# Altium PCB BLDC controlle_V3.PcbDoc
Units mm, origin at the board's own origin, x right, y up, seen from the top; angles counter-clockwise.
Board outline 91.2 x 46.99 mm, 2 copper layers (Top Layer, Bottom Layer); 97 components, 98 nets, 316 pads, 249 vias.
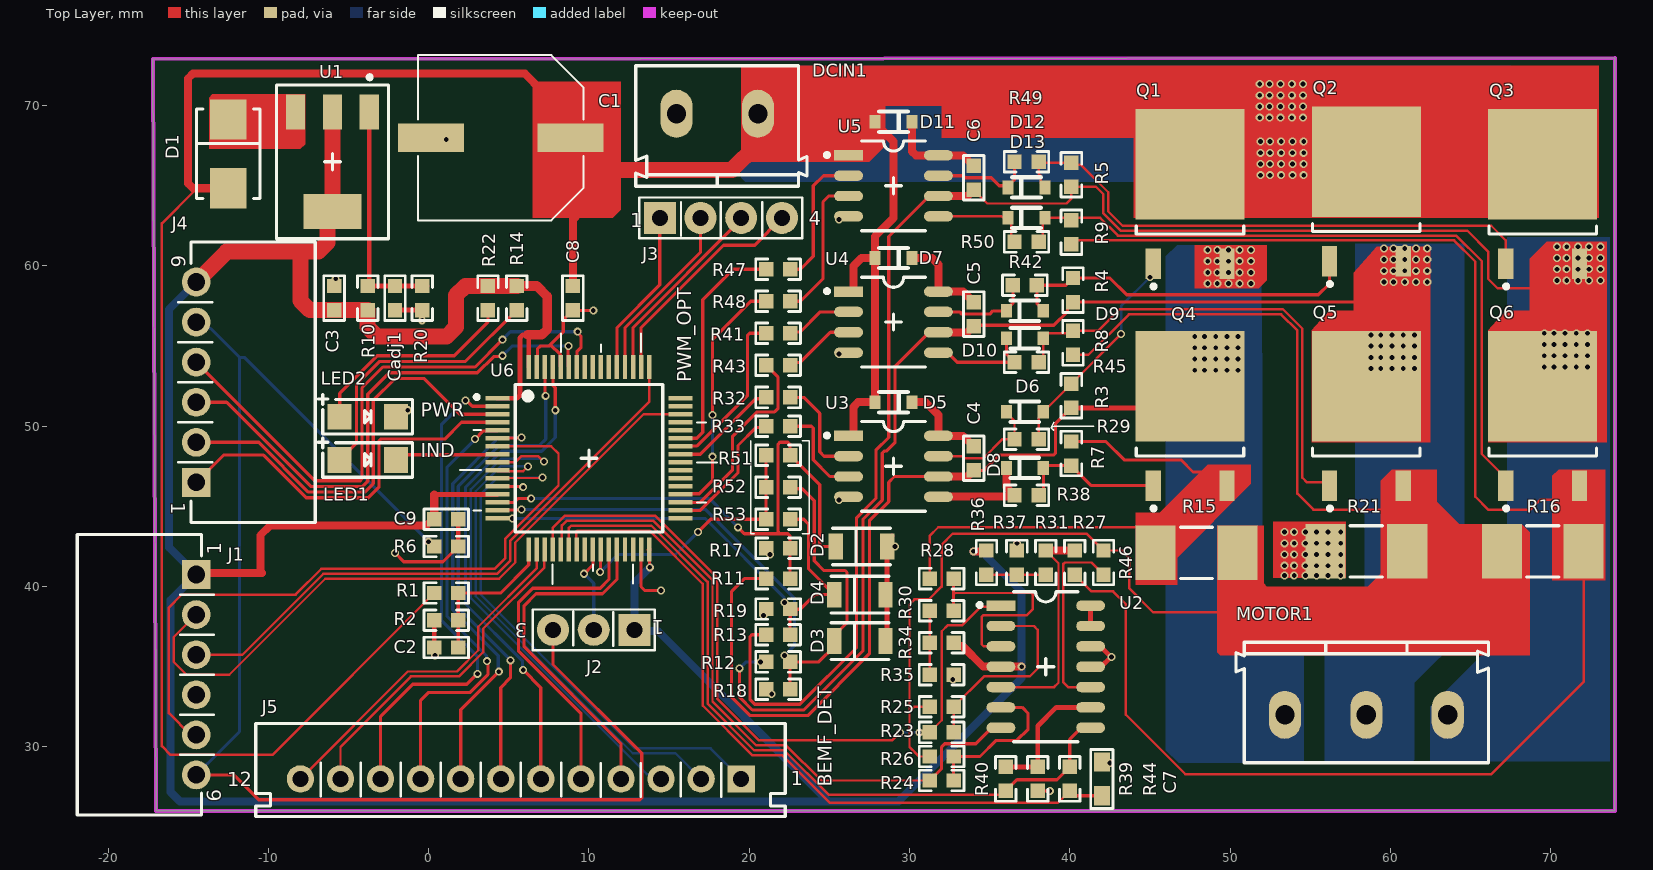
[diagram p0: Top Layer view]
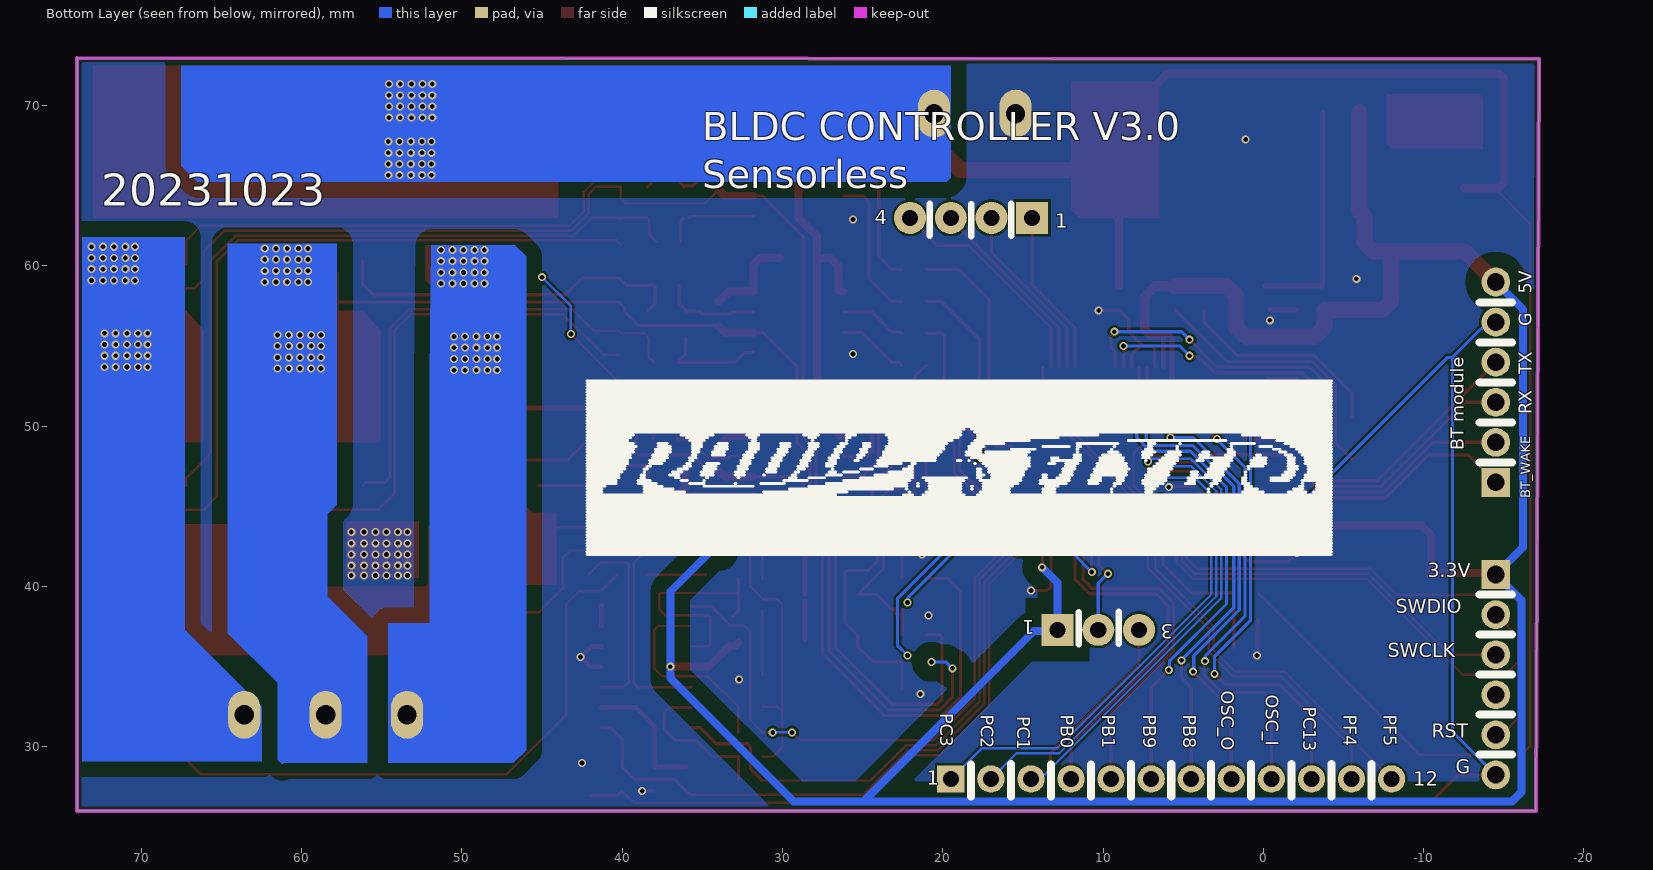
[diagram p1: Bottom Layer view, seen from below]
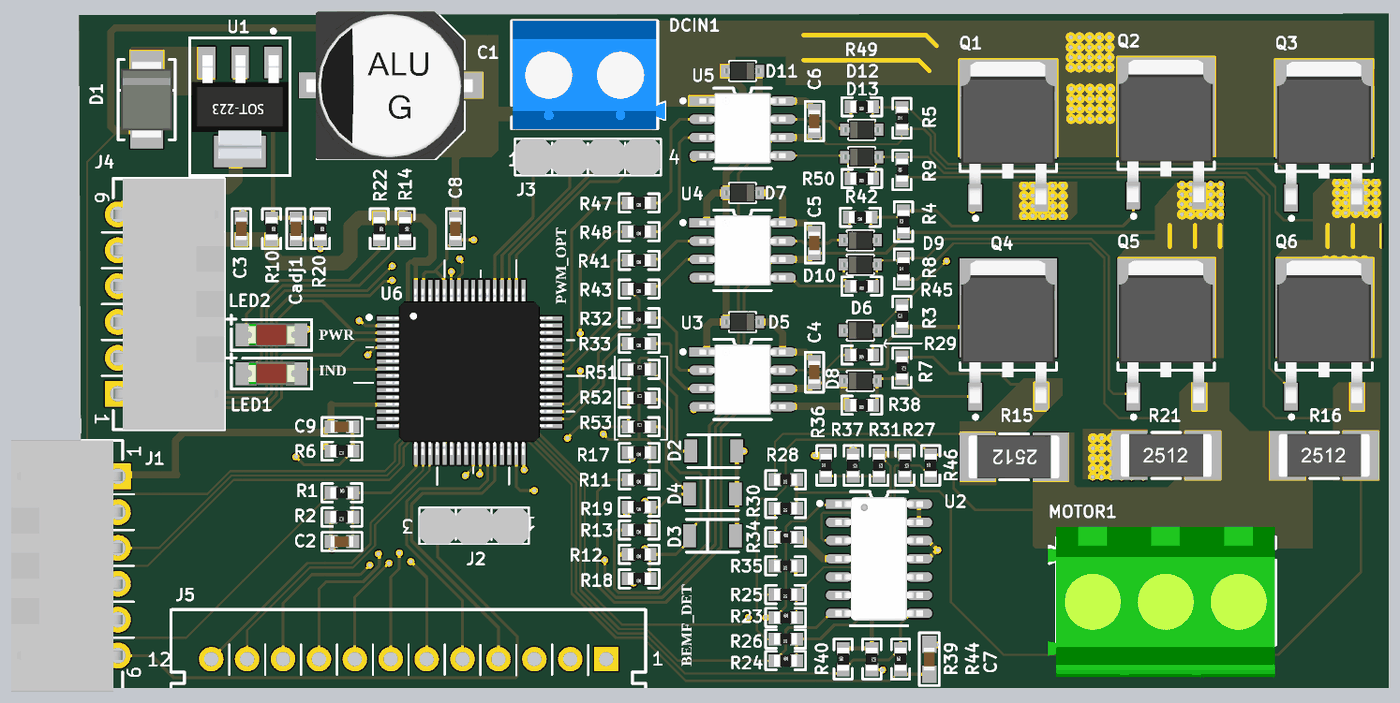
[diagram p2: 3D render of the assembled board from above, using the file's embedded part models]

## Layer stack, top to bottom
Top Solder: solder mask 0.0102, Solder Resist, Dk 3.5
Top Layer: signal copper 0.0356
Dielectric 1: dielectric 0.32, FR-4, Dk 4.8
Bottom Layer: signal copper 0.0356
Bottom Solder: solder mask 0.0102, Solder Resist, Dk 3.5

## Board outline
-17,26 -17.2,72.9 74,72.988 74,26

## Design rules (kind name [scope] priority, off if disabled: settings)
Clearance "Polygon clearence bat" [InPolygon vs InNet('V_Bat')] p1: gap=1 ignorepadtopadclearanceinfootprint=FALSE
Clearance "Polygon clearence power path" [InPolygon vs InNet('PA') Or InNet('PB') Or InNet('PC') Or  InNet('IC') Or InNet('IB') Or InNet('IA') Or  InNet('3.3V')] p2: gap=1 ignorepadtopadclearanceinfootprint=FALSE
Clearance [All] p3: gap=0.152 ignorepadtopadclearanceinfootprint=FALSE
DiffPairsRouting [All] p1: maxlimit=0.254 minlimit=0.254 mostfreqgap=0.254 toplayer_minwidth=0.381 toplayer_maxwidth=0.381 toplayer_prefwidth=0.381 bottomlayer_minwidth=0.381 bottomlayer_maxwidth=0.381 bottomlayer_prefwidth=0.381 substack1={16BC12FD-55DF-4440-831C-986EA8E48B1B} toplayer_{16bc12fd-55df-4440-831c-986ea8e48b1b}_minwidth=0.381 toplayer_{16bc12fd-55df-4440-831c-986ea8e48b1b}_maxwidth=0.381 toplayer_{16bc12fd-55df-4440-831c-986ea8e48b1b}_prefwidth=0.381 bottomlayer_{16bc12fd-55df-4440-831c-986ea8e48b1b}_minwidth=0.381 bottomlayer_{16bc12fd-55df-4440-831c-986ea8e48b1b}_maxwidth=0.381 bottomlayer_{16bc12fd-55df-4440-831c-986ea8e48b1b}_prefwidth=0.381 maxuncoupledlength=12.7
PlaneConnect [All] p1: planeconnectstyle=Direct reliefexpansion=0.508 reliefentries=4 reliefconductorwidth=0.254 reliefairgap=0.254
PolygonConnect [All] p1: connectstyle=Direct reliefconductorwidth=0.254 reliefentries=4 polygonreliefangle="90 Angle" airgapwidth=0.254
RoutingVias [All] p1: holewidth=0.711 width=1.27 viastyle="Through Hole" minholewidth=0.711 minwidth=1.27 maxholewidth=0.711 maxwidth=1.27
SolderMaskExpansion [All] p1: expansion=0.102 istentingtop=FALSE
Width [All] p1: maxlimit=10 minlimit=0.152 preferedwidth=0.254 substack1={16BC12FD-55DF-4440-831C-986EA8E48B1B} toplayer_{16bc12fd-55df-4440-831c-986ea8e48b1b}_minwidth=0.1 bottomlayer_{16bc12fd-55df-4440-831c-986ea8e48b1b}_minwidth=0.1
28 further rules are at their usual default settings.

## Classes and differential pairs
component class MCU: C9 J5 U6
component class E-scooter: 3 C1 C2 C3 C4 C5 C6 C7 C8 Cadj1 D1 D2 D3 D4 D5 D6 D7 D8 D9 D10 D11 D12 D13 DCIN1 LED1 LED2 Q1 Q2 Q3 Q4 Q5 Q6 R1 R2 R3 R4 R5 R6 R7 R8 R9 R10 R11 R12 R13 R14 R15 R16 R17 R18 R19 R20 R21 R22 R23 R24 R25 R26 R27 R28 R29 R30 R31 R32 R33 R34 R35 R36 R37 R38 R39 R40 R41 R42 R43 R44 R45 R46 R47 R48 R49 R50 R51 R53 U1 U2 U3 U4 U5
component class Connector: J1 J2 J3 J4 MOTOR1

## Components (designator, comment, footprint, x,y, rotation, side; value= is the part's Value field where it differs from the comment)
C1 "PBE099550-4710" "CASE - G" 4.5,68 r0 top
C2 "PXL456470-1530" CAPC0603-RW 1.1,36.2 r180 top value=10uf
C3 "PXL456470-1530" CAPC0603-RW -5.9,58 r90 top value=10uf
C4 "PXL456470-1530" CAPC0603-RW 34,48 r90 top value=10uf
C5 "PXL456470-1530" CAPC0603-RW 34,57 r90 top value=10uf
C6 "PXL456470-1530" CAPC0603-RW 34,65.5 r90 top value=10uf
C7 "PXL456470-1530" CAPC0603-SW 42,28 r270 top value=1UF
C8 "PXL456470-1530" CAPC0603-RW 9,58 r90 top value=0.1UF
C9 "PXL456470-1530" CAPC0603-RW 1.1,44.2 r180 top value=0.1uf
Cadj1 "PXL456470-1530" CAPC0603-RW -2.1,58 r270 top value=10uf
D1 "DIO STPS2200U" SMB -12.5,67 r90 top
D2 "RCZ005015-0020" LL34 27,42.5 r180 top
D3 "RCZ005015-0020" LL34 26.9,36.6 r180 top
D4 "RCZ005015-0020" LL34 26.9,39.5 r180 top
D5 "RCD114148-0020" SOD-323 29,51.5 r0 top
D6 "RCD114148-0020" SOD-323 37.2,50.9 r180 top
D7 "RCD114148-0020" SOD-323 29,60.5 r0 top
D8 "RCD114148-0020" SOD-323 37.2,47.4 r180 top
D9 "RCD114148-0020" SOD-323 37.2,57.2 r180 top
D10 "RCD114148-0020" SOD-323 37.2,55.5 r180 top
D11 "RCD114148-0020" SOD-323 29,69 r0 top
D12 "RCD114148-0020" SOD-323 37.3,64.9 r180 top
D13 "RCD114148-0020" SOD-323 37.3,63 r180 top
DCIN1 "KF/WJ/DG 30x connecter" "KF/WJ/DG 301-2p-5.0mm" 18,69.5 r180 top
J1 "T690300121600" "CONN 6P PH=2.5mm RA XHB-6AW-KL" -14.5,34.5 r90 top value=2.5mm
J2 "CCP254010-0103" "HEAD 3P PH=2.54mm 180" 10.3,37.3 r180 top value=2.54mm
J3 "CCP254260-0104" "HEAD 4P PH=2.54mm 180" 18.23,63 r0 top value=2.54mm
J4 "T690300121600" "CONN 6P PH=2.5mm RA XHB-6AW-KL" -14.5,52.75 r270 top value=2.5mm
J5 "T690300029300" "CONN 12P PH=2.5 ST HAA250A-12A" 5.75,28 r0 top value=2.5mm
LED1 "LED1206R_23-21\R6C-AM1N2AY\2A" LED1206-RED -3.8,47.9 r0 top
LED2 "LED1206R_23-21\R6C-AM1N2AY\2A" LED1206-RED -3.8,50.6 r0 top
MOTOR1 "KF/WJ/DG 30x connecter" "KF/WJ/DG 301-3p-5.0mm" 58.5,32 r0 top
Q1 "T5860038503A6" TO252-3 47.5,64.5 r90 top locked
Q2 "T5860038503A6" TO252-3 58.5,64.65 r90 top locked
Q3 "T5860038503A6" TO252-3 69.5,64.5 r90 top locked
Q4 "T5860038503A6" TO252-3 47.5,50.65 r90 top locked
Q5 "T5860038503A6" TO252-3 58.5,50.65 r90 top locked
Q6 "T5860038503A6" TO252-3 69.5,50.65 r90 top locked
R1 "T5024421083A9" 0603-RW 1.1,39.6 r0 top value=43k
R2 "T5024421083A9" 0603-RW 1.1,37.9 r180 top value=6.2k
R3 "T5024421083A9" 0603-RW 40.1,51.9 r90 top value=10k
R4 "T5024421083A9" 0603-RW 40.2,58.5 r90 top value=10k
R5 "T5024421083A9" 0603-RW 40.1,65.7 r90 top value=10k
R6 "T502210202399" 0603-RW 1.1,42.5 r180 top value="0 ohm"
R7 "T5024421083A9" 0603-RW 40.1,48.3 r270 top value=10k
R8 "T5024421083A9" 0603-RW 40.2,55.2 r90 top value=10k
R9 "T5024421083A9" 0603-RW 40.1,62.1 r90 top value=10k
R10 "T5024421083A9" 0603-RW -3.8,58 r270 top value=120
R11 "T5024421083A9" 0603-RW 21.8,40.5 r180 top value=20k
R12 "T5024421083A9" 0603-RW 21.8,35.3 r180 top value=20k
R13 "T5024421083A9" 0603-RW 21.8,37 r180 top value=20k
R14 "T5024421083A9" 0603-RW 5.5,58 r270 top value=50k
R15 "QCF101250-1009" 2512 47.9,42.1 r180 top value=1mR
R16 "QCF101250-1009" 2512 69.5,42.2 r0 top value=1mR
R17 "T5024421083A9" 0603-RW 21.8,42.4 r180 top value=5K
R18 "T5024421083A9" 0603-RW 21.8,33.6 r180 top value=5K
R19 "T5024421083A9" 0603-RW 21.8,38.6 r180 top value=5K
R20 "T5024421083A9" 0603-RW -0.4,58 r270 top value=200
R21 "QCF101250-1009" 2512 58.5,42.2 r0 top value=1mR
R22 "T5024421083A9" 0603-RW 3.7,58 r270 top value=50k
R23 "T5024421083A9" 0603-RW 32,30.9 r0 top value=100k
R24 "T5024421083A9" 0603-RW 32,27.9 r0 top value=100k
R25 "T5024421083A9" 0603-RW 32,32.5 r180 top value=1k
R26 "T5024421083A9" 0603-RW 32,29.4 r180 top value=1k
R27 "T5024421083A9" 0603-RW 40.3,41.5 r270 top value=1k
R28 "T5024421083A9" 0603-RW 32,40.5 r180 top value=1k
R29 "T5024421083A9" 0603-RW 37.3,49.2 r180 top value=4.7
R30 "T5024421083A9" 0603-RW 32,38.5 r180 top value=100K
R31 "T5024421083A9" 0603-RW 38.5,41.5 r270 top value=100K
R32 "T5024421083A9" 0603-RW 21.8,51.8 r180 top value=300
R33 "T5024421083A9" 0603-RW 21.8,50 r180 top value=300
R34 "T5024421083A9" 0603-RW 32,36.5 r0 top value=10k
R35 "T5024421083A9" 0603-RW 32,34.5 r180 top value=10k
R36 "T5024421083A9" 0603-RW 34.8,41.5 r90 top value=10k
R37 "T5024421083A9" 0603-RW 36.7,41.5 r270 top value=10k
R38 "T5024421083A9" 0603-RW 37.3,45.7 r180 top value=4.7
R39 "T5024421083A9" 0603-RW 38,28 r270 top value=1k
R40 "T5024421083A9" 0603-RW 36,28 r90 top value=47k
R41 "T5024421083A9" 0603-RW 21.8,55.8 r180 top value=300
R42 "T5024421083A9" 0603-RW 37.2,58.8 r180 top value=4.7
R43 "T5024421083A9" 0603-RW 21.8,53.8 r180 top value=300
R44 "T5024421083A9" 0603-RW 40,28 r90 top value=10k
R45 "T5024421083A9" 0603-RW 37.3,54 r180 top value=4.7
R46 "T5024421083A9" 0603-RW 42.1,41.5 r90 top value=1k
R47 "T5024421083A9" 0603-RW 21.8,59.8 r180 top value=300
R48 "T5024421083A9" 0603-RW 21.8,57.8 r180 top value=300
R49 "T5024421083A9" 0603-RW 37.3,66.5 r180 top value=4.7
R50 "T5024421083A9" 0603-RW 37.3,61.5 r180 top value=4.7
R51 "T5024421083A9" 0603-RW 21.8,48.2 r0 top value=20k
R52 "T5024421083A9" 0603-RW 21.8,46.2 r0 top value=20k
R53 "T5024421083A9" 0603-RW 21.8,44.2 r0 top value=20k
U1 "AMS1117" SOT223 -6,66.5 r180 top
U2 "RCI033079-0002" SO14 38.5,35 r0 top
U3 "T610900027257" SO8 29,47.5 r0 top
U4 "T610900027257" SO8 29,56.5 r0 top
U5 "T610900027257" SO8 29,65 r0 top
U6 "T610300097225" QFP50P1200X1200X160-64N 10,48 r0 top

## Footprints (in the part's own frame and the unit in brackets; to place one, negate y for a bottom-side part, rotate by r counter-clockwise, add the part's x,y. Pads: shape width x height; smd on the part's side, far side on the other; paste and mask are expansions set on the pad)
0603-RW [mm]
  rect 0.9x0.9 smd mask+0.05: 1(-0.75,0) 2(0.75,0)
  silkscreen extent -1.39,-0.64 1.39,0.64, body extent -0.8,-0.41 0.8,0.39, height 0.3
2512 [mm] "Chip Resistor; Body 6.4 x 3.2 mm (LxW typ)"
  rect 2.5x3.4 smd mask+0.05: 1(-2.55,0) 2(2.55,0)
  silkscreen extent -1,-1.6 1,1.6, body extent -3.17,-1.5 3.18,1.5, height 1.6
CAPC0603-RW [mm] "Body size:  L1.6XW0.8XT0.8mm"
  rect 0.9x0.9 smd mask+0.05: 1(-0.75,0) 2(0.75,0)
  silkscreen extent -1.39,-0.64 1.39,0.64, body extent -0.8,-0.4 0.8,0.4, height 0.8
CAPC0603-SW [mm] "Body size:  L1.6XW0.8XT0.8mm"
  rect 1.2x1 smd mask+0.05: 1(-1.05,0) 2(1.05,0)
  silkscreen extent -1.84,-0.69 1.84,0.69, body extent -0.8,-0.4 0.8,0.4, height 0.8
"CASE - G" [mm] "CHIP ELECT CAP D10mm * H10.2mm"
  rect 4.1x1.8 smd mask+0.05: 1(4.35,0) 2(-4.35,0)
  silkscreen extent -5.15,-5.15 5.15,5.15, body extent -5.87,-5.17 5.73,5.13, height 10.2
"CONN 6P PH=2.5mm RA XHB-6AW-KL" [mm] "WAFER 6P XHB-6AW-KL"
  rect 1.8x1.8 hole 1.1: 1(6.25,0)
  round 1.8 hole 1.1: 2(3.75,0) 3(1.25,0) 4(-1.25,0) 5(-3.75,0) 6(-6.25,0)
  silkscreen extent -8.75,-1.11 8.75,7.43, body extent -8.75,-0.31 8.75,7.42, height 6.56
"CONN 12P PH=2.5 ST HAA250A-12A" [mm] "GP CONNECTOR 12PIN P=2.5"
  rect 1.7x1.7 hole 1: 1(13.75,0)
  round 1.7 hole 1: 2(11.25,0) 3(8.75,0) 4(6.25,0) 5(3.75,0) 6(1.25,0) 7(-1.25,0) 8(-3.75,0) 9(-6.25,0) 10(-8.75,0) 11(-11.25,0) 12(-13.75,0)
  silkscreen extent -16.54,-2.35 16.5,3.45, body extent -16.29,-2.35 16.25,3.45, height 7
"HEAD 3P PH=2.54mm 180" [mm] "HEAD 3P PH=2.54mm 180 H8.6mm"
  rect 2x2 hole 1: 1(-2.54,0)
  round 2 hole 1: 2(0,0) 3(2.54,0)
  silkscreen extent -3.81,-1.27 3.81,1.27, body extent -3.81,-1.24 3.81,1.3, height 8.87
"HEAD 4P PH=2.54mm 180" [mm] "HEAD 4P PH=2.54mm 180 H8.6mm"
  rect 2x2 hole 1: 1(-3.81,0)
  round 2 hole 1: 2(-1.27,0) 3(1.27,0) 4(3.81,0)
  silkscreen extent -5.08,-1.27 5.08,1.27, body extent -5.08,-1.27 5.08,1.27, height 8.57
"KF/WJ/DG 301-2p-5.0mm" [mm]
  oval 2x3 hole 1.2: 1(2.54,0) 2(-2.54,0)
  silkscreen extent -5.6,-3 5.08,4.52, body extent -5.6,-3 5,4.6, height 10
"KF/WJ/DG 301-3p-5.0mm" [mm]
  oval 2x3 hole 1.2: 1(5.08,0) 2(0,0) 3(-5.08,0)
  silkscreen extent -8.14,-3 7.62,4.52, body extent -8.27,-5.26 7.57,5.24, height 14.35
LED1206-RED [mm]
  rect 1.5x1.6 smd mask+0.05: 1(-1.75,0) 2(1.75,0)
  silkscreen extent -3.1,-1.07 2.8,1.38, body extent -1.61,-0.79 1.61,0.81, height 1.1
LL34 [mm] "LL34 D1.5mm L 3.5mm Max"
  rect 0.9x1.6 smd: 1(-1.6,0) 2(1.6,0)
  silkscreen extent -1.8,-1.14 1.8,1.14, body extent -1.8,-0.75 1.8,0.75, height 1.56
QFP50P1200X1200X160-64N [mm] "QFP,0.50mm pitch,square;64 pin,10.00mm L X 10.00mm W X 1.60mm H body"
  rect 1.5x0.28 smd mask+0.12: 1(-5.7,3.75) 2(-5.7,3.25) 3(-5.7,2.75) 4(-5.7,2.25) 5(-5.7,1.75) 6(-5.7,1.25) 7(-5.7,0.75) 8(-5.7,0.25) 9(-5.7,-0.25) 10(-5.7,-0.75) 11(-5.7,-1.25) 12(-5.7,-1.75) 13(-5.7,-2.25) 14(-5.7,-2.75) 15(-5.7,-3.25) 16(-5.7,-3.75) 33(5.7,-3.75) 34(5.7,-3.25) 35(5.7,-2.75) 36(5.7,-2.25) 37(5.7,-1.75) 38(5.7,-1.25) 39(5.7,-0.75) 40(5.7,-0.25) 41(5.7,0.25) 42(5.7,0.75) 43(5.7,1.25) 44(5.7,1.75) 45(5.7,2.25) 46(5.7,2.75) 47(5.7,3.25) 48(5.7,3.75)
  rect 0.28x1.5 smd mask+0.12: 17(-3.75,-5.7) 18(-3.25,-5.7) 19(-2.75,-5.7) 20(-2.25,-5.7) 21(-1.75,-5.7) 22(-1.25,-5.7) 23(-0.75,-5.7) 24(-0.25,-5.7) 25(0.25,-5.7) 26(0.75,-5.7) 27(1.25,-5.7) 28(1.75,-5.7) 29(2.25,-5.7) 30(2.75,-5.7) 31(3.25,-5.7) 32(3.75,-5.7) 49(3.75,5.7) 50(3.25,5.7) 51(2.75,5.7) 52(2.25,5.7) 53(1.75,5.7) 54(1.25,5.7) 55(0.75,5.7) 56(0.25,5.7) 57(-0.25,5.7) 58(-0.75,5.7) 59(-1.25,5.7) 60(-1.75,5.7) 61(-2.25,5.7) 62(-2.75,5.7) 63(-3.25,5.7) 64(-3.75,5.7)
  silkscreen extent -8.05,-7.85 7.98,7.8, body extent -5.82,-5.77 5.76,5.82, height 1.02
SMB [mm] "SMB Body W 3.94mm L 4.70mm Max"
  rect 2.5x2.3 smd: 1(-2.15,0) 2(2.15,0)
  silkscreen extent -2.79,-1.98 2.79,1.98, body extent -2.7,-1.8 2.7,1.8, height 2.27
SO8 [mm] "SO8 8Pin Pitch 1.27mm Body 4.9mm X 3.9mm"
  rect 1.8x0.65 smd: 1(-2.8,1.905)
  oval 1.8x0.65 smd: 2(-2.8,0.635) 3(-2.8,-0.635) 4(-2.8,-1.905) 5(2.8,-1.905) 6(2.8,-0.635) 7(2.8,0.635) 8(2.8,1.905)
  silkscreen extent -4.25,-2.8 2,2.8, body extent -3,-2.45 3,2.45, height 1.75
SO14 [mm]
  rect 1.8x0.65 smd: 1(-2.8,3.81)
  oval 1.8x0.65 smd: 2(-2.8,2.54) 3(-2.8,1.27) 4(-2.8,0) 5(-2.8,-1.27) 6(-2.8,-2.54) 7(-2.8,-3.81) 8(2.8,-3.81) 9(2.8,-2.54) 10(2.8,-1.27) 11(2.8,0) 12(2.8,1.27) 13(2.8,2.54) 14(2.8,3.81)
  silkscreen extent -4.22,-4.67 2,4.67, body extent -3.05,-4.3 3.05,4.3, height 1.75
SOD-323 [mm] "SMD Body W 1.4mm L 1.8mm"
  rect 0.7x0.85 smd: 1(-1.15,0) 2(1.15,0)
  silkscreen extent -0.89,-0.64 0.89,0.64, body extent -1.3,-0.67 1.3,0.68, height 1.1
SOT223 [mm]
  rect 1.2x2.2 smd: 1(-2.3,-3.1) 2(0,-3.1) 3(2.3,-3.1)
  rect 3.6x2.2 smd: 4(0,3.1)
  silkscreen extent -3.5,-5.37 3.5,4.8, body extent -3.35,-3.6 3.35,3.6, height 1.86
TO252-3 [mm] "D-PAK, 3-Leads, Body 6.5x7.0mm, Pitch 2.3mm, Lead Span 9.7mm, IPC Medium Density"
  rect 1.9x0.95 smd: 1(-4.35,2.3) 3(-4.35,-2.3)
  rect 6.9x6.8 smd: 4(1.85,0)
  silkscreen extent -5.87,-3.35 -2,3.35, body extent -4.8,-3.24 5.14,3.3, height 2.39

## Part data
C1: library part "CAP E 470uF 25V 20% SMD", "CHIP ELECT 470uF 25V 20% D10xL10 105", PACKAGE="CASE - G", Tolerance=20%, Voltage=25V, Customer Specific=N/A, DIP&SMD=SMD, SAP=T551471445000, Type=Capacitor, Vendor Code=10010262, Vendor Name=东莞市晴远电子有限公司
C2 C3 C4 C5 C6 C8 C9 Cadj1: library part "CAP0603 0.015uF 50V 10%", "GP CHIP CAP 0.015uF 50V 10% 0603 TYPE X7R", PACKAGE=CAPC0603, Tolerance=10%, Voltage=50V, Customer Specific=N/A, DIP&SMD=SMD, Other=X7R, SAP=T542021537508, Type=Capacitor, Vendor Code=10010262, Vendor Name=东莞市晴远电子有限公司
C7: library part "CAP0603 0.015uF 50V 10%", "GP CHIP CAP 0.015uF 50V 10% 0603 TYPE X7R", PACKAGE=CAPC0603, Tolerance=10%, Voltage=10V, Customer Specific=N/A, DIP&SMD=SMD, Other=X7R, SAP=T542021537508, Type=Capacitor, Vendor Code=10010262, Vendor Name=东莞市晴远电子有限公司
D1: "DIODE SCHOTTKY 200V 2A SMB", PACKAGE=SMB, CREATE_NAME=Nathan, CREATE_TIME=19-Jun-2020, Customer Specific=N/A, DIP&SMD=SMD, MFG=STMicroelectronics, MFG Part=STPS2200U, Type=DIODE
D2 D3 D4: library part TCLLZ15V, "CHIP ZENER 15V 0.5W MLL34", Current=5MA, PACKAGE=LL34, Power=500MW, Tolerance=5%, Voltage=15V, Customer Specific=N/A, DIP&SMD=SMD, MFG="TAK CHEONG", MFG Part=Z3v3, SAP=T573003832016, Type=ZENER, Vendor Code=10009207, Vendor Name="MOBICON HOLDINGS LTD."
D5 D6 D7 D8 D9 D10 D11 D12 D13: library part 1N4148WS, "DIODE SW 1N4148 VF=0.7V SOD-323", Current=150MA, PACKAGE=SOD-323, Voltage=100V, Customer Specific=N/A, DIP&SMD=SMD, MFG="TW SEMICONDUCTOR", MFG Part=1N4148WS, SAP=T572005070208, Type=DIODE
DCIN1: library part "KF/WJ/DG 30x", "接线端子 2Pin"
J1 J4: library part "CONN PH 6P PH=2.5mm RA XHB-6AW-KL", "CONNECTOR 6PIN P=2.5 WHITE 90 K", CREATE_NAME=Nathan, CREATE_TIME=27-Sep-2017, DIP&SMD=DIP, MFG=金佳电子, MFG Part=XHB-6AW-KL, SAP=T690300121600, Type=Connector
J2: library part "HEAD 3P PH=2.54mm 180", "HEAD PIN 3P P2.54*H11.6MM", Current=3A, DIP&SMD=DIP, SAP=T690300031100, Type=Connector, Vendor Code=10020373, Vendor Name=深圳市利民丰电子有限公司
J3: library part "HEAD 4P PH=2.54mm 180 H11.5mm", "HEAD PIN 4P P2.54xH11.5MM", Current=3A, DIP&SMD=DIP, SAP=T690300023200, Type=Connector, Vendor Code=10009989, Vendor Name=亿源电子有限公司
J5: library part "CONN 12P PH=2.5 ST HAA250A-12A", "CONNECTOR 12 PIN P:2.5MM P2.54-12 K", Current=3A, CREATE_NAME=Nathan, CREATE_TIME=10-Aug-2017, DIP&SMD=DIP, MFG=金科基, MFG Part=HAA250A-12A, SAP=T690300029300, Type=Connector
LED1 LED2: "CHIP LED RED TYPE 1206", Color=Red, PACKAGE=1206, CREATE_NAME=Nathan, CREATE_TIME=18-Aug-2020, DIP&SMD=SMD, MFG=EVERLIGHT, MFG Part=23-21\R6C-AM1N2AY\2A, Type=LED
MOTOR1: library part "KF/WJ/DG 30x-3P", "接线端子 3Pin"
Q1 Q2 Q3 Q4 Q5 Q6: library part "NMOS LSG60R240HT", "NMOS 600V LSG60R240HT TO252( LONTEN K", Current=17A, PACKAGE=TO252, Voltage=600V, CREATE_NAME=Nathan, CREATE_TIME=12-Oct-2019, Customer Specific=N/A, DIP&SMD=SMD, MFG=LONTEN, MFG Part=LSG60R240HT, SAP=T5860038503A6, Type="N-CHANNEL MOSFET"
R1 R2 R3 R4 R5 R7 R8 R9 R10 R11 R12 R13 R14 R17 R18 R19 R20 R22 R23 R24 R25 R26 R27 R28 R29 R30 R31 R32 R33 R34 R35 R36 R37 R38 R39 R40 R41 R42 R43 R44 R45 R46 R47 R48 R49 R50 R51 R52 R53: library part "RES0201 1/20W 1% 4.42K OHM_WALSIN", "CHIP 4.42K OHM 200PPM +-1% 0201 WALS L", PACKAGE=0603, Power=1/20W, CREATE_NAME=Nathan, CREATE_TIME=23-July-2019, Customer Specific=N/A, DIP&SMD=SMD, MFG="WALSIN (華新)", MFG Part=WR02X4421FAL, SAP=T5024421083A9, TOL=1%, Type=Resistor
R6: library part "RES0603 1/16W 1% 21K OMH_WALSIN", "CHIP 21K OHM 100PPM +-1% 0603 WALS L", PACKAGE=0603, Power=1/10W, CREATE_NAME=Nathan, CREATE_TIME=08-Feb-2018, Customer Specific=N/A, DIP&SMD=SMD, MFG="WALSIN (華新)", SAP=T502210202399, TOL=1%, Type=Resistor
R15 R16 R21: library part "RES2512 1W 1% 10 OHM", "CHIP RES. 10 OHM 1W 1% 2512", PACKAGE=2512, Power=1W, Customer Specific=N/A, DIP&SMD=SMD, SAP=T502100A07399, TOL=1%, Type=Resistor, Vendor Code=10010262, Vendor Name=东莞市晴远电子有限公司
U1: "800mA LOW DROPOUT VOLTAGE REGULATOR , SOT-223", PACKAGE=SOT-223, CREATE_NAME=Nathan, CREATE_TIME=17-Nov-2020, Customer Specific=N/A, DIP&SMD=SMD, MFG="Advanced Monolithic Systems", MFG Part=AMS1117, Type=IC
U2: library part MC33079DT, "IC opamp quad MC33079 bipolar SO14", Customer Specific=N/A, DIP&SMD=SMD, MFG=STMICROELECTRONICS, MFG Part=MC33079DT, SAP=T610500026102, Type=IC
U3 U4 U5: library part 2ED2106S06F, "DRIVER 2ED2106S06F DSO-8 INFINEO K", CREATE_NAME=Nathan, CREATE_TIME=14-Apr-2020, Customer Specific=N/A, DIP&SMD=SMD, MFG=Infineon, MFG Part=2ED2106S06F, SAP=T610900027257, Type=IC
U6: library part STM32F030RCT6TR, "MCU STM32F030RCT6TR LQFP64 ST K", CREATE_NAME=Nathan, CREATE_TIME=02-NOV-2017, Customer Specific=N/A, DIP&SMD=SMD, MFG="ST     (STM意法半導體)", MFG Part=STM32F030R8T6, SAP=T610300097225, Type=IC

## Via types
v1: diameter 0.5, hole 0.3, Top Layer to Bottom Layer, 249 vias

## Nets (pads, with @x,y where several pads share a name; then routed paths per layer and width w, separated by ;. In a path a pad name is that pad's centre, name@x,y a point inside that pad or via, vN(x,y) a via of type N, cw(c..) or ccw(c..) an arc to the next point about the centre after c; other vN are vias at no path point)
3.3V: C3.1 C9.2 J1.1 J2.1 J4.6 R10.2 R14.1 R22.1 R34.2 R36.2 U1.2 U1.4 U2.4 U6.1 U6.13 U6.32 U6.64 | length 202.1
  Top Layer w0.2: U6.32 13.775,42.275 13.775,41.225 v1(13.8,41.2)
  Top Layer w0.3: 0.35,45.75 U6.13 ; U6.1 5.524,51.75 5.7,51.926 5.7,55.524 5.876,55.7 6.2,55.7 6.25,55.65 U6.64 ; U6.32 U6.32@13.76,42.31 ; R36.2@34.75,42.3 R36.2
  Top Layer w0.5: J1.1 -14.41,40.84 -10.4,40.84 -10.5,40.94 -10.5,43.2 -9.9,43.8 -0.15,43.8 0.35,44.3 0.35,45.75 ; R34.2 32.95,36.3 33.3,36.3 34.6,35 U2.4 v1(37,35) ; v1(34,42.2) 34.75,42.2 R36.2
  Top Layer w0.6: R14.1 6.75,58.75 7.4,58.1 7.4,56.051 7.049,55.7 6.2,55.7
  Top Layer w1: J4.6 -12.6,60.9 -8,60.9 ; U1.2 U1.4 -6.3,63.1 -6.3,61.479 -6.879,60.9 -8,60.9 ; R14.1 R22.1 2.286,58.75 1.7,58.164 1.7,56.186 1.114,55.6 -3.214,55.6 -3.8,56.186 R10.2 C3.1 -7.414,57.25 -8,57.836 -8,60.9
  Bottom Layer w0.5: J4.6 -16.2,57.3 -16.2,42.45 J1.1 -16.1,39.15 -16.1,27.193 -15.507,26.6 24.939,26.6 ; v1(13.8,41.2) 12.84,40.24 J2.1 12.898,37.242 14.297,37.242 24.939,26.6 ; v1(34,42.2) 34.478,42.2 37,39.678 v1(37,35) 37,34.3 29.3,26.6 24.939,26.6
A15: J3.4 U6.50 | length 14.1
  Top Layer w0.2: U6.50 13.25,56.157 18.393,61.3 20.34,61.3 J3.4
AD_BAT: C2.1 R1.2 R2.1 U6.17 | length 9.5
  Top Layer w0.2: C2.1 R2.1 R1.2 4.5,39.6 6.25,41.35 U6.17
BEMFA: D2.2 R11.1 R17.1 R51.2 U6.14 | length 36.5
  Top Layer w0.2: U6.14 5.35,45.25 5.6,45.5 v1(6.4,45.5) ; v1(19.3,43.698) 19.698,43.3 21.917,43.3 ; R11.1 R17.1 22.55,43.15 22.4,43.3 21.917,43.3 ; D2.2 24.521,42.5 24.404,42.617 24.404,46.346 R51.2 22.55,48.85 22.4,49 21.917,49 21.8,48.883 21.8,43.417 21.917,43.3
  Bottom Layer w0.2: v1(6.4,45.5) 17.498,45.5 v1(19.3,43.698)
BEMFB: D3.2 R12.1 R18.1 R52.2 U6.15 | length 42.4
  Top Layer w0.2: U6.15 4.325,44.775 5.775,44.775 v1(5.8,44.8) ; R18.1 R12.1 24.35,35.3 25.3,36.25 D3.2 25.3,36.95 26.1,37.75 26.1,40.883 25.983,41 24.652,41 24.052,41.6 24.052,45.348 23.3,46.1 22.65,46.1 R52.2
  Bottom Layer w0.2: v1(5.8,44.8) 17.3,44.8 22.819,39.281 22.819,36.319 v1(22.2,35.7)
BEMFC: D4.2 R13.1 R19.1 R53.2 U6.16 | length 31.9
  Top Layer w0.2: v1(5.225,44.248) 5.224,44.249 U6.16@4.301,44.249 ; R13.1 22.55,37.95 ; R19.1 22.55,37.95 ; R53.2 23.4,44.2 23.7,43.9 23.7,41.1 D4.2 24.1,39.5 23.183,38.583 22.9,38.583 22.9,38.3 22.875,38.275 22.592,38.275 22.567,38.25 22.567,37.967 22.55,37.95 ; U6.16 U6.16@4.301,44.249
  Bottom Layer w0.2: v1(5.225,44.248) 17.252,44.248 22.161,39.339 22.161,39.039 v1(22.2,39)
BEMFM: R51.1 R52.1 R53.1 U6.26 | length 17.1
  Top Layer w0.2: v1(10.7,40.9) 10.725,40.925 10.725,42.275 U6.26 ; v1(16.8,43.4) 17.6,44.2 R53.1 R52.1 R51.1
  Bottom Layer w0.2: v1(10.7,40.9) 11.8,42 15.4,42 v1(16.8,43.4)
BT_STA: J4.2 U6.3 | length 27
  Top Layer w0.2: J4.2 -10.602,49 -7.498,45.896 -3.978,45.896 -3.452,46.422 -3.452,51.623 -2.1,52.975 -0.275,52.975 1.95,50.75 U6.3
BT_WAKE: J4.1 U6.4 | length 24.2
  Top Layer w0.2: J4.1 -12.8,48.2 -10.3,48.2 -7.644,45.544 -3.756,45.544 -3.1,46.2 -3.1,49.083 -2.983,49.2 1,49.2 2.05,50.25 U6.4
C10: J3.3 U6.51 | length 12.1
  Top Layer w0.2: U6.51 12.75,56.154 19.5,62.904 J3.3
C11: J3.2 U6.52 | length 11.3
  Top Layer w0.2: U6.52 12.25,56.152 16.96,60.862 J3.2
C12: J3.1 U6.53 | length 10.4
  Top Layer w0.2: U6.53 11.75,56.15 14.42,58.82 J3.1
CHG_DET: U6.24
DGND: J1.6 J2.3 J4.5 R6.2 | length 88.6
  Top Layer w0.2: J1.6 -12.15,28.25 -10.6,26.7 13.183,26.7 13.3,26.817 13.3,29.6 7.76,35.14 J2.3
  Bottom Layer w0.2: J1.6 -13.05,29.7 -11.8,30.95 -11.8,54.3 ; J4.5 -14.067,56.5 -13.669,56.101 -13.601,56.101 -11.8,54.3 ; v1(0,42.8) -11.5,54.3 -11.8,54.3
GND: C1.2 C2.2 C3.2 C7.1 C8.1 C9.1 Cadj1.2 D2.1 D3.1 D4.1 DCIN1.1 LED2.2 R2.2 R6.1 R17.2 R18.2 R19.2 R20.2 R21.1 R35.1 R37.1 R39.2 U2.11 U2.12 U3.4 U4.4 U5.4 U6.12 U6.31 U6.60 U6.63 | length 32.7
  Top Layer w0.2: v1(-2.1,42.1) -1.548,41.548 0.898,41.548 R6.1 ; U6.12 v1@5.796,46.25 ; U6.63 6.79,53.74 6.79,54.835 6.955,55 7.5,55 7.598,55.098 ; U6.60 8.21,53.74 8.21,54.486 7.598,55.098 ; v1(10.275,57.225) 9.025,57.225 C8.1 8.4,56.65 8.4,55.9 7.598,55.098 ; U6.31 13.25,40 13.5,39.75 v1(14.5,39.75) ; R39.2 v1(38.75,27.25)
  Top Layer w0.3: Cadj1.2 R20.2 ; C2.2 R2.2 ; R6.1 C9.1 ; v1@5.796,46.25 5.846,46.2 v1(5.9,46.2) ; D3.1@28.6,36.7 D4.1@28.6,39.1 ; D4.1@28.6,39.5 D2.1 28.6,42.85 D2.1@28.9,43.15 ; U2.11 41.946,35 42.546,35.6 v1@42.572,35.6 ; U2.12 41.902,36.27 v1@42.572,35.6 ; v1(42.6,35.6) v1@42.572,35.6
  other v1: 42.5,29 21.4,33.3 32.7,34.2 0.4,35.7 20.9,38.2 53.4,40.7 54,40.7 54.7,40.7 55.4,40.7 56.1,40.7 56.9,40.7 53.4,41.3 54,41.3 54.7,41.3 55.4,41.3 56.1,41.3 56.9,41.3 21.3,42 53.4,42 54,42 54.7,42 55.4,42 56.1,42 56.9,42 29.1,42.5 36.7,42.7 53.4,42.7 54,42.7 54.7,42.7 55.4,42.7 56.1,42.7 56.9,42.7 53.4,43.4 54,43.4 54.7,43.4 55.4,43.4 56.1,43.4 56.9,43.4 25.6,45.4 -1.3,51 25.6,54.5 -0.4,56.609 -5.8,59.2 25.6,62.9 1.1,67.9
HIN1: R32.2 U6.41 | length 6.8
  Top Layer w0.2: U6.41 16.95,48.25 20.417,51.717 20.967,51.717 R32.2
HIN2: R41.2 U6.42 | length 10.5
  Top Layer w0.2: U6.42 15.724,48.774 16.75,48.774 19.9,51.924 19.9,55.683 20.017,55.8 R41.2
HIN3: R47.2 U6.43 | length 14.6
  Top Layer w0.2: U6.43 16.729,49.25 17.1,49.621 17.1,57.9 19,59.8 R47.2
HO1: D6.1 Q1.1 R3.2 R29.1 | length 13.1
  Top Layer w0.152: R29.1 38.05,50.525 38.35,50.825 D6.1 38.35,50.975 38.624,51.249 38.699,51.249 R3.2 v1(43.2,55.75) v1@43.2,55.8
  Bottom Layer w0.152: v1(43.2,55.75) 43.2,57.5 v1(45,59.3)
HO2: D9.1 Q2.1 R4.2 R42.1 | length 22.3
  Top Layer w0.2: D9.1 38.35,57.275 37.95,57.675 R42.1 39.75,58.8 R4.2 42.5,59.25 43.55,58.2 55.5,58.2 56.2,58.9 Q2.1
HO3: D12.1 Q3.1 R5.2 R49.1 | length 35.1
  Top Layer w0.152: D12.1 38.176,65.174 38.176,65.624 38.05,65.751 R49.1 38.1,66.45 R5.2 40.239,66.311 40.689,66.311 42.4,64.6 42.4,63.4 43.29,62.51 66.29,62.51 67.2,61.6 Q3.1
I2C1_SCL: J5.6 U6.61 | length 31.5
  Top Layer w0.2: v1(5.9,34.8) 7,33.7 J5.6 ; U6.61 7.75,52.55 7.9,52.4 v1(7.9,51)
  Bottom Layer w0.2: v1(5.9,34.8) 5.86,34.84 5.86,35.35 2.3,38.91 2.3,46.202 4.546,48.448 7.048,48.448 7.9,49.3 v1(7.9,51)
I2C1_SDA: J5.7 U6.62 | length 31
  Top Layer w0.2: J5.7 4.5,33.7 5.1,34.3 v1(5.1,35.4) ; U6.62 7.25,51.95 v1(7.3,51.9)
  Bottom Layer w0.2: v1(5.1,35.4) 5.1,35.433 1.85,38.683 1.85,46.25 4.4,48.8 6.902,48.8 7.3,49.198 v1(7.3,51.9)
I2C2_SCL: U6.47
I2C2_SDA: U6.48
IA: Q4.3 R7.1 R15.2 R28.2 | length 29
  Top Layer w0.152: R28.2 31.25,43.161 31.789,43.7 44.176,43.7 45.35,42.526 R15.2
  Top Layer w0.2: R7.1 42.25,49.05 43.4,47.9 46.937,47.9 47.687,47.15 49.425,47.15 49.8,46.775 Q4.3
IA_ADC: R23.1 U2.1 U6.20 | length 46.6
  Top Layer w0.152: U6.20 7.75,43.68 8.474,44.404 14.15,44.404 18.013,40.541 18.013,32.987 20.6,30.4 28.9,30.4 v1(29.4,30.9) ; v1(30.609,30.9) R23.1 32.012,31.662 32.012,37.212 32.4,37.6 33.3,37.6 34.45,38.75 35.64,38.75 U2.1
  Bottom Layer w0.152: v1(29.4,30.9) v1(30.609,30.9)
IB_ADC: R24.1 U2.7 U6.21 | length 42.4
  Top Layer w0.152: U6.21 8.314,42.364 8.314,43.814 8.6,44.1 14.024,44.1 17.709,40.415 17.709,32.822 20.435,30.096 22.304,30.096 24.5,27.9 R24.1
  Top Layer w0.2: R24.1 32,28.65 32,30 32.198,30.198 34.133,30.198 35.125,31.19 U2.7
IC: Q6.3 R9.1 R16.2 R27.2 | length 99.7
  Top Layer w0.152: R9.1 40.345,61.595 63.974,61.595 65.292,60.276 65.292,45.608 66.1,44.8 68.737,44.8 69.364,45.426 71.401,45.426 71.8,45.825 Q6.3 ; R27.2 41.35,39.7 42.7,39.7 43.5,38.9 43.5,32 47.2,28.3 66.3,28.3 72.05,34.05 R16.2
ISUM: Q5.3 R8.1 R15.1 R16.1 R21.2 R25.2 R26.2 R46.2 | length 70.3
  Top Layer w0.152: R26.2 30.6,29.4 30,30 30,32.2 ; R25.2 30.3,32.5 30,32.2 ; R8.1 41.15,54.45 43.685,56.985 53.185,56.985 54.196,55.974 54.196,45.804 55.2,44.8 60,44.8 ; 50.2,38.4 45.2,38.4 43.7,39.9 43.7,41.8 43.25,42.25 R46.2 41.05,43.3 32.7,43.3 32,42.6 32,40 31.2,39.2 30.3,39.2 30,38.9 30,32.2
ISUM_ADC: R40.1 R44.2 U2.8 U6.22 | length 48.1
  Top Layer w0.152: U6.22 8.75,43.656 8.889,43.796 13.898,43.796 17.404,40.289 17.404,32.696 20.309,29.791 22.178,29.791 24.97,27 35.75,27 R40.1
  Top Layer w0.2: R40.1 36.702,27.952 39.202,27.952 R44.2 40,30.465 40.725,31.19 U2.8
ISUM_FILTERED: C7.2 R44.1 U6.23 | length 45.9
  Top Layer w0.152: U6.23 9.2,42.35 9.2,43.4 9.291,43.491 13.772,43.491 17.1,40.163 17.1,32.57 20.183,29.487 22.052,29.487 25.039,26.5 39.25,26.5 R44.1
  Top Layer w0.2: R44.1 40.3,26.95 C7.2
LED_IND: LED1.2 U6.8 | length 6.5
  Top Layer w0.2: LED1.2 -1.732,48.218 4.268,48.218 U6.8
LED_WS: J2.2 U6.25 | length 5.5
  Top Layer w0.2: v1@9.704,40.8 10.25,41.346 U6.25
  Bottom Layer w0.2: v1(9.7,40.8) 10.3,40.2 J2.2
LIN1: R33.2 U6.34 | length 8.5
  Top Layer w0.2: U6.34 16.95,44.75 19.3,47.1 19.3,48.8 20.417,49.917 20.967,49.917 R33.2
LIN2: R43.2 U6.35 | length 12.8
  Top Layer w0.2: U6.35 16.952,45.25 18.948,47.246 18.948,49.348 20.5,50.9 21.583,50.9 21.8,51.117 21.8,53.05 R43.2
LIN3: R48.2 U6.36 | length 15.5
  Top Layer w0.2: U6.36 15.74,45.79 16.89,45.79 17.7,46.6 v1(17.7,48.1) ; v1(17.7,50.7) 17.7,55.4 20.1,57.8 R48.2
  Bottom Layer w0.2: v1(17.7,48.1) v1(17.7,50.7)
LO1: D8.1 Q4.1 R7.2 R38.1 | length 9.3
  Top Layer w0.2: R38.1 38.35,46 D8.1 38.5,47.55 R7.2 41.35,46.3 Q4.1
LO2: D10.1 Q5.1 R8.2 R45.1 | length 30.2
  Top Layer w0.152: R45.1 38.35,54.3 38.35,55.526 38.624,55.8 40.05,55.8 R8.2 41.75,55.95 43.1,57.3 53.3,57.3 54.5,56.1 54.5,46.8 54.8,46.5 56,46.5 Q5.1
LO3: D13.1 Q6.1 R9.2 R50.1 | length 44.8
  Top Layer w0.154: R50.1@37.85,61.5 38.3,61.95 38.3,62.85 D13.1 40.1,63 40.175,62.925 40.25,63 41.9,63 43,61.9 64.1,61.9 65.7,60.3 65.7,48.275 67.2,46.775 Q6.1
MPU_EXT2: U6.54
NetC4_2: C4.2 D5.2 U3.8 | length 5.7
  Top Layer w0.5: D5.2 31,51.5 31.8,50.7 U3.8 33.345,49.405 C4.2
NetC5_2: C5.2 D7.2 U4.8 | length 6
  Top Layer w0.5: D7.2 31.4,60.5 31.8,60.1 U4.8 33.345,58.405 C5.2
NetC6_2: C6.2 D11.2 U5.8 | length 6.1
  Top Layer w0.2: U5.8@31.6,66.905 U5.8
  Top Layer w0.5: D11.2 30.15,67.15 30.395,66.905 U5.8@31.6,66.905 ; U5.8 33.345,66.905 C6.2
NetCadj1_1: Cadj1.1 R10.1 R20.1 U1.1 | length 14.5
  Top Layer w0.3: U1.1 -3.7,58.75 -1.9,58.75 R20.1@-0.1,58.75
NetD1_2: D1.2 U1.3
NetD6_2: D6.2 R29.2 U3.7 | length 7.2
  Top Layer w0.152: U3.7 33.265,48.135 33.4,48 34.6,48 35.8,49.2 R29.2 36.55,50.325 36.05,50.825 D6.2
NetD8_2: D8.2 R38.2 U3.5 | length 6.7
  Top Layer w0.5: U3.5 31.829,45.624 36.474,45.624 R38.2 36.05,46.2 D8.2
NetD9_2: D9.2 R42.2 U4.7 | length 6.2
  Top Layer w0.2: U4.7 33.124,57.135 33.259,57 35,57 35.2,57.2 D9.2 36.05,57.275 36.45,57.675 R42.2
NetD10_2: D10.2 R45.2 U4.5 | length 6.7
  Top Layer w0.2: U4.5 32.375,54.595 32.97,54 R45.2 36.05,54.5 D10.2
NetD12_2: D12.2 R49.2 U5.7 | length 6.4
  Top Layer w0.2: U5.7 33.359,65.635 33.494,65.5 35.1,65.5 35.6,65 D12.2@36.15,65 ; D12.2 36.15,64.975 36.55,65.375 R49.2
NetD13_2: D13.2 R50.2 U5.5 | length 5.7
  Top Layer w0.152: U5.5 35.755,63.095 D13.2@35.85,63 ; D13.2 36.35,62.8 R50.2@36.35,61.5
NetLED1_1: LED1.1 R14.2 | length 17.1
  Top Layer w0.2: LED1.1 -5.55,47.95 -4.9,48.6 -4.85,48.6 -4.508,48.942 -4.508,52.594 -3.054,54.048 2.298,54.048 R14.2
NetLED2_1: LED2.1 R22.2 | length 13.3
  Top Layer w0.2: LED2.1 -5.55,52.05 -3.2,54.4 1.6,54.4 3.7,56.5 R22.2
NetR23_2: R23.2 R25.1 U2.2 | length 12.6
  Top Layer w0.152: R23.2 R25.1 34.65,34.4 37.5,34.4 38,34.9 38,37.3 37.76,37.54 U2.2
NetR24_2: R24.2 R26.1 U2.6 | length 9.7
  Top Layer w0.2: R24.2 R26.1 34.4,29.4 35.4,30.4 36.7,30.4 37.4,31.1 37.4,32.083 37.023,32.46 U2.6
NetR27_1: R27.1 R31.1 U2.5 | length 14.1
  Top Layer w0.152: U2.5 39.026,33.73 39.296,34 39.296,41.454 R31.1
  Top Layer w0.5: R31.1 R27.1
NetR28_1: R28.1 R30.1 U2.3 | length 14.8
  Top Layer w0.152: 32.75,39.5 32.85,39.6 37.611,39.6 37.7,39.511 37.7,38.6 37.3,38.2 34.589,38.2 34.5,38.111 34.5,36.4 34.63,36.27 U2.3
  Top Layer w0.2: R28.1 32.75,39.5 R30.1 R30.1@33.1,38.15
NetR30_2: R30.2 R34.1 R35.2 | length 4
  Top Layer w0.152: R35.2 R34.1 R30.2
NetR31_2: R31.2 R36.1 R37.2 | length 3.7
  Top Layer w0.152: R36.1 R31.2
NetR32_1: R32.1 U3.2 | length 6.6
  Top Layer w0.2: R32.1 23.4,51.8 24.4,50.8 24.4,48.4 24.665,48.135 U3.2
NetR33_1: R33.1 U3.3 | length 6.1
  Top Layer w0.2: R33.1 23.883,50 24,49.883 24,47.9 25.035,46.865 U3.3
NetR39_1: R39.1 R40.2 U2.9 | length 8.3
  Top Layer w0.3: R40.2 R39.1 38,31.3 39.16,32.46 U2.9
NetR41_1: R41.1 U4.2 | length 4.2
  Top Layer w0.2: R41.1 22.633,55.883 23.183,55.883 24.435,57.135 U4.2
NetR43_1: R43.1 U4.3 | length 4.5
  Top Layer w0.2: R43.1 22.733,53.983 23.183,53.983 25.065,55.865 U4.3
NetR46_1: R46.1 U2.10 | length 12.1
  Top Layer w0.152: U2.10 39.896,33.73 39.6,34.026 39.6,41.411 39.689,41.5 41.35,41.5 R46.1
NetR47_1: R47.1 U5.2 | length 8.6
  Top Layer w0.2: R47.1 23.2,59.8 24,60.6 24,65 24.635,65.635 U5.2
NetR48_1: R48.1 U5.3 | length 9.2
  Top Layer w0.2: R48.1 23.2,57.8 24.6,59.2 24.6,64 24.965,64.365 U5.3
NetU2_13: U2.13 U2.14 | length 1.3
  Top Layer w0.3: U2.13 U2.14
PA: C4.1 MOTOR1.3 Q1.3 Q4.4 R3.1 R11.2 U3.6 | length 53.3
  Top Layer w0.2: R11.2 19.7,40.5 18.9,39.7 18.9,33.1 20.052,31.948 23.648,31.948 27.5,35.8 27.5,44.1 28.7,45.3 28.7,46.5 29.065,46.865 U3.6 ; C4.1 34.65,47.25 35.6,48.2 38.983,48.2 39.1,48.317 39.1,50.15 R3.1
  Top Layer w0.3: R3.1 46.15,51.15 Q4.4
  Top Layer w0.5: U3.6 33.615,46.865 C4.1
  other v1: 47.8,53.5 48.4,53.5 49.1,53.5 49.8,53.5 50.5,53.5 47.8,54.2 48.4,54.2 49.1,54.2 49.8,54.2 50.5,54.2 47.8,54.9 48.4,54.9 49.1,54.9 49.8,54.9 50.5,54.9 47.8,55.6 48.4,55.6 49.1,55.6 49.8,55.6 50.5,55.6 48.6,58.9 49.2,58.9 49.9,58.9 50.6,58.9 51.3,58.9 48.6,59.6 49.2,59.6 49.9,59.6 50.6,59.6 51.3,59.6 48.6,60.3 49.2,60.3 49.9,60.3 50.6,60.3 51.3,60.3 48.6,61 49.2,61 49.9,61 50.6,61 51.3,61
PB: C5.1 MOTOR1.2 Q2.3 Q5.4 R4.1 R12.2 U4.6 | length 66.3
  Top Layer w0.2: v1(19.402,34.9) 19.402,33.096 20.198,32.3 23.4,32.3 27.1,36 27.1,44.198 28.3,45.398 28.3,48.334 28.417,48.451 28.551,48.451 29.1,49 29.1,53.74 31.225,55.865 U4.6 ; C5.1 34.05,56.3 39,56.3 39.863,57.163 39.863,57.413 R4.1 58.725,57.75 60.8,59.825 Q2.3
  Top Layer w0.5: U4.6 33.615,55.865 C5.1
  Bottom Layer w0.2: v1(19.402,34.9) 19.802,35.3 v1(20.7,35.3)
  other v1: 58.8,53.6 59.4,53.6 60.1,53.6 60.8,53.6 61.5,53.6 58.8,54.3 59.4,54.3 60.1,54.3 60.8,54.3 61.5,54.3 58.8,55 59.4,55 60.1,55 60.8,55 61.5,55 58.8,55.7 59.4,55.7 60.1,55.7 60.8,55.7 61.5,55.7 59.6,59 60.2,59 60.9,59 61.6,59 62.3,59 59.6,59.7 60.2,59.7 60.9,59.7 61.6,59.7 62.3,59.7 59.6,60.4 60.2,60.4 60.9,60.4 61.6,60.4 62.3,60.4 59.6,61.1 60.2,61.1 60.9,61.1 61.6,61.1 62.3,61.1
PB1: J5.5 U6.27 | length 20.7
  Top Layer w0.2: J5.5 9.5,32.1 5.6,36 5.6,39 6.5,39.9 10.7,39.9 11.25,40.45 U6.27
PB2: J5.4 U6.28 | length 21.6
  Top Layer w0.2: U6.28 11.75,40.45 10.848,39.548 6.7,39.548 5.952,38.8 5.952,36.248 12,30.2 J5.4
PB10: U6.29
PB11: U6.30
PB12: U6.33
PC: C6.1 MOTOR1.1 Q3.3 Q6.4 R5.1 R13.2 U5.6 | length 90.2
  Top Layer w0.152: C6.1 34.85,63.9 39.8,63.9 40.1,64.2 R5.1 41.62,64.95 42.096,64.474 42.096,63.274 43.164,62.205 64.795,62.205 66.1,60.9 66.1,59.2 66.7,58.6 69.1,58.6 70.65,60.15 Q3.3
  Top Layer w0.2: R13.2 20.169,37 20.052,36.883 20.052,32.944 20.344,32.652 23.152,32.652 26.7,36.2 26.7,44.296 27.9,45.496 27.9,48.5 28.7,49.3 28.7,61.84 31.225,64.365 U5.6
  Top Layer w0.5: U5.6 33.615,64.365 C6.1
  other v1: 69.6,53.7 70.2,53.7 70.9,53.7 71.6,53.7 72.3,53.7 69.6,54.4 70.2,54.4 70.9,54.4 71.6,54.4 72.3,54.4 69.6,55.1 70.2,55.1 70.9,55.1 71.6,55.1 72.3,55.1 69.6,55.8 70.2,55.8 70.9,55.8 71.6,55.8 72.3,55.8 70.4,59.1 71,59.1 71.7,59.1 72.4,59.1 73.1,59.1 70.4,59.8 71,59.8 71.7,59.8 72.4,59.8 73.1,59.8 70.4,60.5 71,60.5 71.7,60.5 72.4,60.5 73.1,60.5 70.4,61.2 71,61.2 71.7,61.2 72.4,61.2 73.1,61.2
PC1: J5.3 U6.9 | length 32
  Top Layer w0.152: U6.9 5.393,47.75 5.762,48.12 6.843,48.12 7.163,47.8 v1(7.2,47.8)
  Bottom Layer w0.152: v1(7.2,47.8) 7.106,47.8 6.928,47.978 4.54,47.978 2.631,46.069 2.631,39.269 13.604,28.296 14.204,28.296 J5.3
PC2: J5.2 U6.10 | length 31.3
  Top Layer w0.152: U6.10 4.35,47.2 5.9,47.2 v1(6.2,47.5)
  Bottom Layer w0.152: v1(6.2,47.5) 4.492,47.5 2.935,45.943 2.935,39.395 12.73,29.6 15.4,29.6 J5.2
PC3: J5.1 U6.11 | length 34.4
  Top Layer w0.152: U6.11 4.325,46.775 7.075,46.775 v1(7.1,46.8)
  Bottom Layer w0.152: v1(7.1,46.8) 4.29,46.8 3.24,45.75 3.24,39.521 12.857,29.904 17.596,29.904 J5.1
PC13: J5.10 U6.2 | length 31.8
  Top Layer w0.2: J5.10 -3,31.9 -1,33.9 2.382,33.9 v1(3.041,34.559) ; v1(2.3,51.6) 2.378,51.6 2.728,51.25 U6.2
  Bottom Layer w0.2: v1(2.3,51.6) 0.794,50.094 0.794,37.897 3.041,35.65 v1(3.041,34.559)
PF4: J5.12 U6.18 | length 22.2
  Top Layer w0.152: J5.12 -1.3,34.7 1.77,34.7 3.096,36.026 3.096,37.496 6.75,41.15 U6.18
PF5: J5.11 U6.19 | length 21.3
  Top Layer w0.152: J5.11 -5.5,30 -1.104,34.396 1.896,34.396 3.4,35.9 3.4,37.37 7.2,41.17 7.2,42.25 U6.19
RCC_OSC_IN: J5.9 U6.5 | length 27.9
  Top Layer w0.2: J5.9 -0.5,32.9 0,33.4 2.592,33.4 3.7,34.508 3.7,35.29 v1(3.645,35.345) ; v1(2.9,49.2) 3.41,49.71 4.26,49.71 U6.5
  Bottom Layer w0.2: v1(2.9,49.2) 1.146,47.446 1.146,38.154 3.611,35.689 3.611,35.379 v1(3.645,35.345)
RCC_OSC_OUT: J5.8 U6.6 | length 27.6
  Top Layer w0.2: J5.8 2,32.31 v1(4.379,34.689) ; U6.6 4.326,49.276 5.774,49.276 v1(5.8,49.302)
  Bottom Layer w0.2: v1(4.379,34.689) 4.343,34.725 4.343,35.692 1.498,38.537 1.498,46.416 4.382,49.3 5.798,49.3 v1(5.8,49.302)
RST: J1.5 U6.7 | length 43
  Top Layer w0.152: J1.5 -14.85,30.75 -16.204,32.104 -16.204,38.696 -15.4,39.5 -8.3,39.5 -6.7,41.1 4.1,41.1 4.791,41.791 4.791,42.991 8.1,46.3 8.1,48.3 7.65,48.75 U6.7
SPI1_MISO: U6.56
SPI1_MOSI: U6.57
SPI1_SCLK: U6.55
SWCLK: J1.3 U6.49 | length 37.7
  Top Layer w0.152: J1.3 -11.62,35.75 -6.574,40.796 4.256,40.796 5.096,41.635 5.096,42.865 13.75,51.52 U6.49
SWDIO: J1.2 U6.46 | length 42.9
  Top Layer w0.152: J1.2 -15.9,36.85 -15.9,35.3 -15.1,34.5 -12.439,34.5 -6.448,40.491 4.391,40.491 5.4,41.5 5.4,42.739 13.411,50.75 U6.46
UART1_RX: J4.3 U6.59 | length 33.5
  Top Layer w0.2: J4.3 -12.604,51.5 -7.352,46.248 -4.123,46.248 -3.804,46.567 -3.804,51.996 -2.456,53.344 3.044,53.344 4.05,54.35 4.55,54.35 v1(4.6,54.4) ; v1(8.718,55.007) 8.7,54.989 8.7,54.45 8.71,54.44 8.71,53.74 U6.59
  Bottom Layer w0.2: v1(4.6,54.4) 5.2,55 8.711,55 v1(8.718,55.007)
UART1_TX: J4.4 U6.58 | length 36.4
  Top Layer w0.2: J4.4 -7.1,46.6 -4.273,46.6 -4.156,46.717 -4.156,52.392 -2.852,53.696 2.896,53.696 v1(4.6,55.4) ; U6.58 9.25,54.65 9.5,54.9 9.5,55.633 9.3,55.833 v1(9.3,55.9)
  Bottom Layer w0.2: v1(4.6,55.4) 5.1,55.9 v1(9.3,55.9)
V_Bat: C1.1 C8.2 D1.1 D5.1 D7.1 D11.1 DCIN1.2 Q1.4 Q2.4 Q3.4 R1.1 U3.1 U4.1 U5.1 | length 142.6
  Top Layer w0.152: -14.45,64.85 -14.579,64.721 -16.645,62.655 -16.645,30.045 -16.1,29.5 -9.75,29.5 R1.1
  Top Layer w0.5: D1.1 -14.45,64.85 -14.707,64.85 -15,65.143 -15,71.707 -14.707,72 6,72 7.05,70.95 7.05,68.65 7.7,68 C1.1 ; C8.2 9,62.9 9.4,63.3 ; U3.1 26.425,49.405 26.5,49.48 26.5,51.207 26.793,51.5 D5.1 D7.1 ; U4.1 26.425,58.405 26.5,58.48 26.5,60 27,60.5 D7.1 ; U5.1 26.2,68.7 26.5,69 D11.1 27.85,68.925 29,67.775 29,63 27.85,61.85 D7.1
  Top Layer w1: C1.1 10,68 10.4,67.6 10.4,66.586 10.986,66 18.914,66 20.459,67.545 20.459,69.419 DCIN1.2
  other v1: 51.889,65.662 52.489,65.662 53.189,65.662 53.889,65.662 54.589,65.662 51.889,66.362 52.489,66.362 53.189,66.362 53.889,66.362 54.589,66.362 51.889,67.062 52.489,67.062 53.189,67.062 53.889,67.062 54.589,67.062 51.889,67.762 52.489,67.762 53.189,67.762 53.889,67.762 54.589,67.762 51.85,69.25 52.45,69.25 53.15,69.25 53.85,69.25 54.55,69.25 51.85,69.95 52.45,69.95 53.15,69.95 53.85,69.95 54.55,69.95 51.85,70.65 52.45,70.65 53.15,70.65 53.85,70.65 54.55,70.65 51.85,71.35 52.45,71.35 53.15,71.35 53.85,71.35 54.55,71.35
W1_PWM: U6.37
W2_PWM: U6.38
W3_PWM: U6.39
W4_PWM: U6.40
pads on no net: J1.4 U6.44 U6.45

## Polygon pours and split planes (outlines as drawn)
GND on Bottom Layer "GND_L02_P007" (solid, remove dead copper, pour order 7): -17.25,73.25 -17.25,26 -16.75,25.5 -16.5,25.75 74.5,25.75 74.5,73 74.25,73.25

## Keep-outs
Keep-Out Layer:
  the board outline again, w0.254

## Other copper
Top Layer:
  region net PA: 47.8,61.3 52.3,61.3 52.3,59.1 51.8,58.6 47.8,58.6
  region net GND: 52.7,44.05 57.2,44.05 57.2,40.55 52.7,40.55
  region net ISUM: 49.2,43.8 49.2,35.9 49.4,35.7 68.7,35.7 68.7,43.4 68.2,43.9 59.5,43.9 59.5,40.9 58.6,40 52.3,40 52.1,40.2 52.1,43.8
  region net IA: 51.3,47.6 48.612,47.6 45.612,44.6 44.1,44.6 44.1,40.1 46.7,40.1 46.7,41.8 51.3,46.4
  region net PB: 59.153,61.2 57.7,59.579 57.7,57.2 56.2,57.2 55.1,56 55.1,55.9 55.1,49 62.5,49 62.5,61.143 62.367,61.2
  region net ISUM: 68.2,43.9 64.3,43.9 62.9,45.3 62.9,47.3 60.1,47.3 59.4,46.6 59.4,40.4 68.2,40.4
  region net IC: 70.5,47.3 70.1,46.9 70.1,40.4 73.4,40.4 73.4,47.3
  region net PC: 69.75,61.5 68.7,60.45 68.7,57.2 67.2,57.2 66.1,56 66.1,55.9 66.1,49 73.5,49 73.5,61.5
  region net NetD1_2: -13.7,70.5 -13.5,70.7 -7.7,70.7 -7.7,67.6 -8,67.3 -13.7,67.3
  region net V_Bat: 44.5,68 32,68 32,70.5 44.5,70.5
  region net V_Bat: 28,70 44,70 44,63 73,63 73,72.5 28,72.5 27.5,72
  region net V_Bat: 6.5,71.5 6.5,63 11.5,63 12,63.5 12,71.5
  region net V_Bat: 19.5,72.5 28.5,72.5 28.5,67.5 27.5,66.5 19.5,66.5
Bottom Layer:
  region net V_Bat: 19.5,72.5 19.5,65.5 19.75,65.25 66.5,65.25 67.5,66.25 67.5,72.5
  region net PB: 62.9,61.4 57.8,61.4 57.8,45.1 58.4,44.5 58.4,39.4 55.9,36.9 55.9,29 61.1,29 61.2,28.9 61.5,29.2 61.5,34 64.6,37.1 64.6,61.4
  region net PA: 51.9,61.3 46.7,61.3 46,60.6 46,29.8 46.8,29 54.6,29 54.6,37.7 52,37.7 52,53.2
  region net PC: 62.5,29.1 62.5,32.5 67.3,37.3 67.3,61.8 73.7,61.8 73.7,42.7 73.7,29.1
  region net PC: 69.6,61.5 68.9,60.8 68.9,53.3 72.8,53.3 73.7,54.2 73.7,61.5
  region net PB: 58.8,61.4 58.1,60.7 58.1,53.2 62,53.2 62.9,54.1 62.9,61.4
  region net PA: 47.8,61.3 47.1,60.6 47.1,53.1 51,53.1 51.9,54 51.9,61.3

## Silkscreen, mask and mechanical layers (free items; w line width, h text height)
Top Overlay:
  lines w0.1: 20.1,49.1 20.1,43.3 20.3,43.3 ; 23.3,43.3 23.75,43.3 23.75,49.1 23.3,49.1 ; 39,49.75 38.833,49.917 ; 39,50.25 38.833,49.917 ; 41.5,50 39,50 38.833,49.917
  text "PWM_OPT" at 16.708,52.75 h1.5 r90
  text "PWR" at -0.5,50.271 h1.5
  text "IND" at -0.5,47.771 h1.5
  text "BEMF_DET" at 25.458,27.501 h1.5 r90
Bottom Overlay:
  drawing of 399 lines, arcs and shapes, not listed
  text "BLDC CONTROLLER V3.0 / Sensorless" at 35,64.25 h3
  text "20231023" at 72.5,63.75 h2
  text "5V" at -16.746,58.254 h0.8 r270
  text "G" at -16.746,56.254 h0.8 r270
  text "TX" at -16.746,53.254 h0.8 r270
  text "RX" at -16.746,50.754 h0.8 r270
  text "BT module" at -12.496,48.504 h0.8 r270
  text "BT_WAKE" at -16.646,45.504 h0.6 r270
  text "3.3V" at -10.25,40.271 h1.5
  text "SWDIO" at -8.25,38.021 h1.5
  text "SWCLK" at -7.75,35.271 h1.5
  text "OSC_O" at 2.613,33.496 h0.8 r90
  text "OSC_I" at -0.137,33.246 h0.8 r90
  text "PC13" at -2.504,32.496 h0.8 r90
  text "PC3" at 20.146,32.096 h0.8 r90
  text "PF5" at -7.504,31.996 h0.8 r90
  text "PF4" at -5.004,31.996 h0.8 r90
  text "PB8" at 4.996,31.996 h0.8 r90
  text "PB9" at 7.496,31.996 h0.8 r90
  text "PB1" at 10.046,31.996 h0.8 r90
  text "PB0" at 12.646,31.996 h0.8 r90
  text "PC2" at 17.646,31.996 h0.8 r90
  text "PC1" at 15.346,31.896 h0.8 r90
  text "RST" at -10.5,30.271 h1.5
  text "G" at -12.001,28.021 h1.5
Top Solder:
  lines w0.3: 33.25,69.75 41.25,69.75 42,69 ; 33.25,71.5 41.75,71.5 42.5,70.75 ; 58.75,56.75 58.75,58.25 ; 60.5,56.75 60.5,58.25 ; 62.25,56.75 62.25,58.25 ; 69.75,56.75 69.75,58.25 ; 71.5,56.75 71.5,58.25 ; 73.5,56.75 73.5,58.25
Bottom Solder:
  lines w0.3: 28,69.5 48,69.5 49.5,68 ; 28,71.25 48.5,71.25 49.75,70 ; 28.25,67.75 47.5,67.75 49.25,66 ; 47.75,34 47.75,51.75 ; 49.75,34.25 49.75,51.75 ; 58.25,34.75 60,36.5 60,51.75 ; 60.5,34.75 62.25,36.5 62.25,51.75 ; 66.75,33.5 69.25,36 69.25,51.75 ; 68.75,32 72,35.25 72,51.75

## Text inside footprints (layer, text, board x,y; h text height)
J1: Top Overlay "6" at -12.95,26.575 h0.89 r90; Top Overlay "1" at -12.95,42 h0.89 r90
J2: Top Overlay "1" at 14.694,37.884 h0.89 r180; Top Overlay "3" at 6.16,37.706 h0.89 r180; Bottom Overlay "1" at 14.262,37.91 h0.89 r180; Bottom Overlay "3" at 5.626,37.656 h0.89 r180
J3: Top Overlay "1" at 12.566,62.416 h0.89; Top Overlay "4" at 23.716,62.543 h0.89; Bottom Overlay "1" at 12.998,62.39 h0.89; Bottom Overlay "4" at 24.25,62.594 h0.89
J4: Top Overlay "6" at -16.05,60.675 h0.89 r270; Top Overlay "1" at -16.05,45.25 h0.89 r270
J5: Top Overlay "1" at 22.6,27.6 h0.89; Top Overlay "12" at -12.55,27.55 h0.89; Bottom Overlay "1" at 20.993,27.644 h0.89; Bottom Overlay "12" at -9.34,27.575 h0.89